# Altium PCB ExpandBoardZero.PcbDoc
Units mil, origin at the board's own origin, x right, y up, seen from the top; angles counter-clockwise.
Board outline 2559.06 x 1181.1 mil, 2 copper layers (Top Layer, Bottom Layer); 12 components, 11 nets, 78 pads, 4 vias.
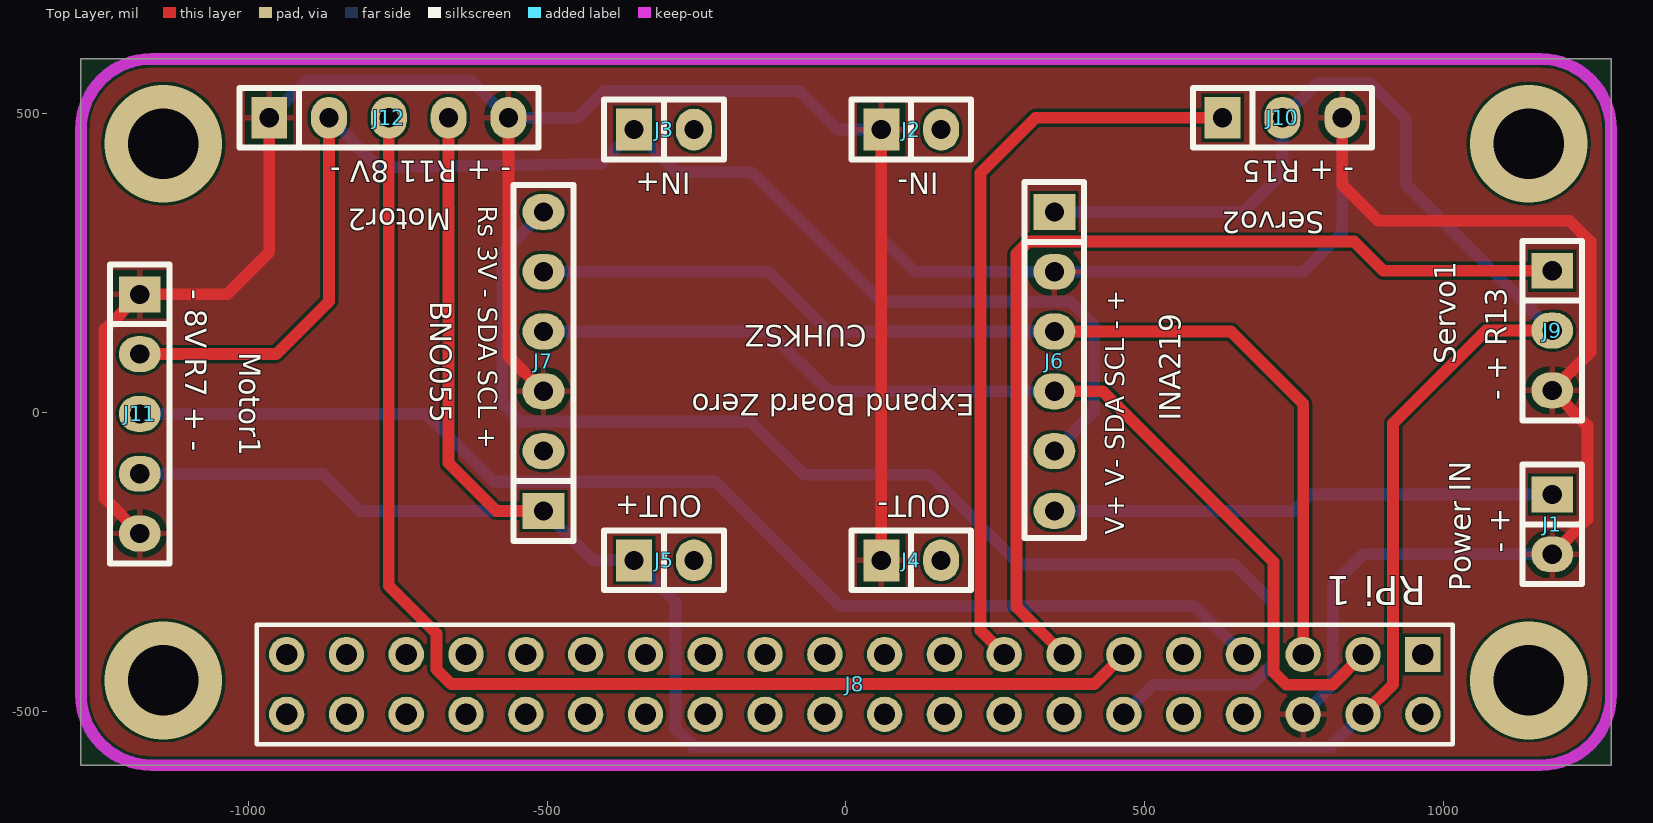
[diagram p0: Top Layer view]
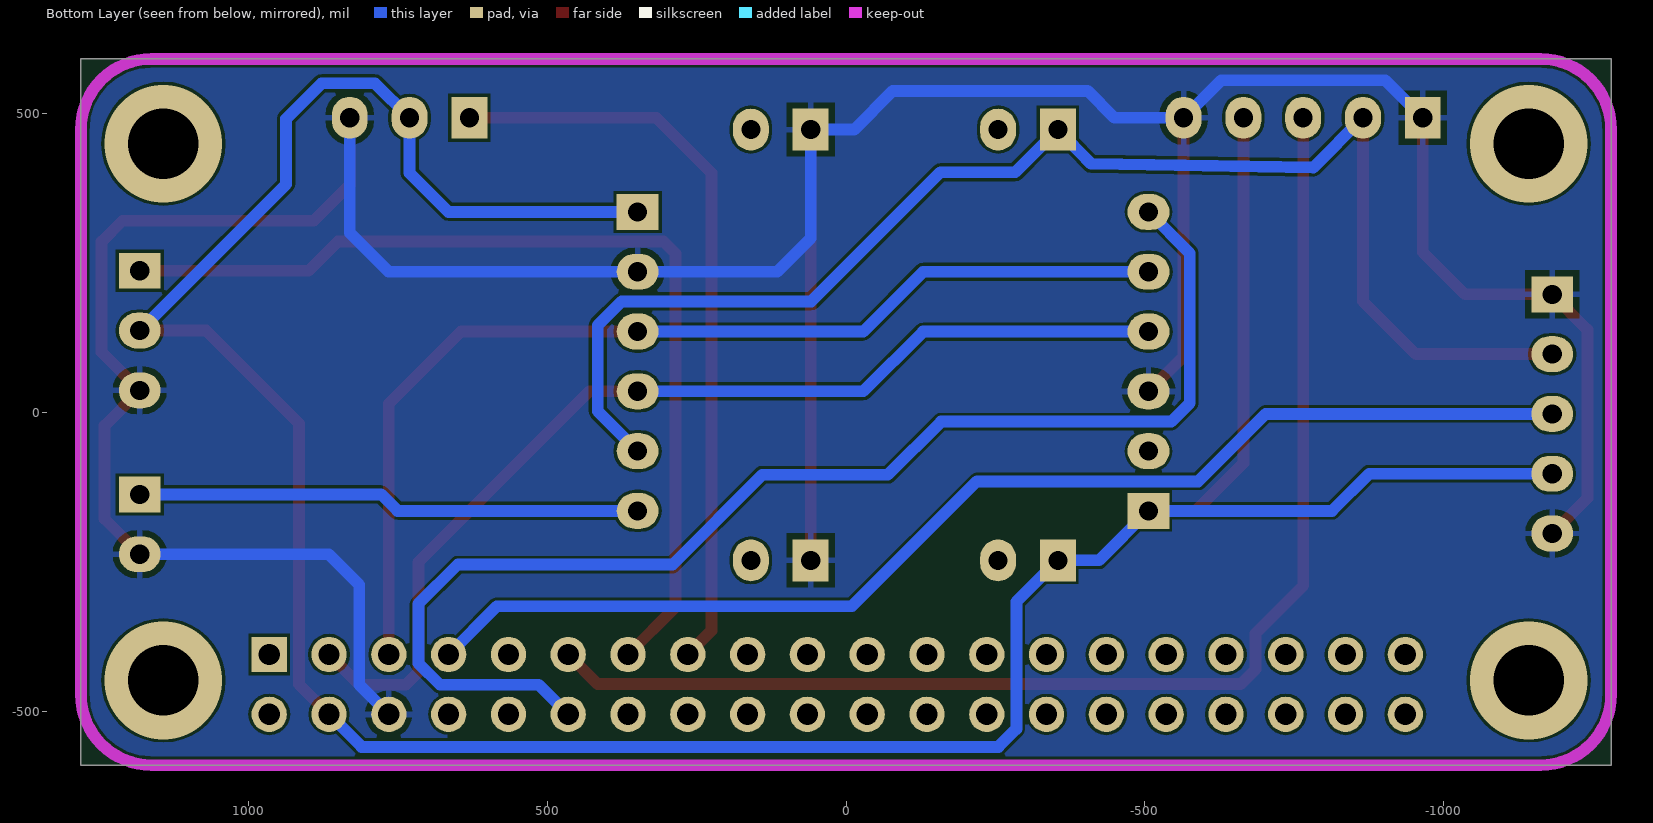
[diagram p1: Bottom Layer view, seen from below]

## Layer stack, top to bottom
Top Solder: solder mask 0.4, Solder Resist, Dk 3.5
Top Layer: signal copper 1.4
Dielectric 1: dielectric 12.6, FR-4, Dk 4.8
Bottom Layer: signal copper 1.4
Bottom Solder: solder mask 0.4, Solder Resist, Dk 3.5

## Board outline
-1279.53,-590.55 1279.53,-590.55 1279.53,590.55 -1279.53,590.55

## Design rules (kind name [scope] priority, off if disabled: settings)
Clearance [All] p1: gap=4.92
PolygonConnect [All] p1: connectstyle=Relief reliefconductorwidth=10 reliefentries=4 polygonreliefangle="90 Angle" airgapwidth=10
RoomDefinition relay [InComponentClass('relay')] p1: confinementstyle=ConfineIn formatcopy=TRUE lockcomponents=FALSE outline -1279.53,-590.55 1279.53,-590.55 1279.53,590.55 -1279.53,590.55
RoutingVias [All] p1: holewidth=28 width=50 viastyle="Through Hole" minholewidth=28 minwidth=50 maxholewidth=28 maxwidth=50
ShortCircuit [All] p1: allowed=TRUE
SolderMaskExpansion [All] p1: expansion=4
Width [All] p1: maxlimit=3937.01 minlimit=19.68 preferedwidth=19.68
29 further rules are at their usual default settings.

## Components (designator, comment, footprint, x,y, rotation, side; value= is the part's Value field where it differs from the comment)
J1 "Power" "Pin HDR1X2/2.54mm-S" 1181.1,-137.8 r0 top
J2 "IN-" "Pin HDR1X2/2.54mm-S" 59.06,472.44 r90 top
J3 "IN+" "Pin HDR1X2/2.54mm-S" -354.33,472.44 r90 top
J4 "OUT-" "Pin HDR1X2/2.54mm-S" 59.06,-248.03 r90 top
J5 "OUT+" "Pin HDR1X2/2.54mm-S" -354.33,-248.03 r90 top
J6 "INA219" "Pin HDR1X6/2.54mm-S" 348.43,334.65 r0 top
J7 "BNO055" "Pin HDR1X6/2.54mm-S" -505.91,-165.35 r180 top
J8 "Raspberry Pi" "Pin HDR2X20/2.54mm-S" 964.57,-405.51 r180 top
J9 "Servo1" "Pin HDR1X3/2.54mm-S" 1181.1,236.22 r0 top
J10 "Servo2" "Pin HDR1X3/2.54mm-S" 629.92,492.13 r90 top
J11 "Motor1" "Pin HDR1X5/2.54mm-S" -1181.1,196.85 r0 top
J12 "Motor2" "Pin HDR1X5/2.54mm-S" -964.57,492.13 r90 top

## Footprints (in the part's own frame and the unit in brackets; to place one, negate y for a bottom-side part, rotate by r counter-clockwise, add the part's x,y. Pads: shape width x height; smd on the part's side, far side on the other; paste and mask are expansions set on the pad)
"Pin HDR1X2/2.54mm-S" [mil]
  rect 70x60 hole 32: 1(0,0)
  oval 70x60 hole 32: 2(0,-100)
  silkscreen extent -50,-150 50,50, body extent -50,-150 50,50, height 336
"Pin HDR1X3/2.54mm-S" [mil]
  rect 70x60 hole 32: 1(0,0)
  oval 70x60 hole 32: 2(0,-100) 3(0,-200)
  silkscreen extent -50,-250 50,50, body extent -50,-250 50,50, height 336
"Pin HDR1X5/2.54mm-S" [mil]
  rect 70x60 hole 32: 1(0,0)
  oval 70x60 hole 32: 2(0,-100) 3(0,-200) 4(0,-300) 5(0,-400)
  silkscreen extent -50,-450 50,50, body extent -50,-450 50,50, height 336
"Pin HDR1X6/2.54mm-S" [mil]
  rect 70x60 hole 32: 1(0,0)
  oval 70x60 hole 32: 2(0,-100) 3(0,-200) 4(0,-300) 5(0,-400) 6(0,-500)
  silkscreen extent -50,-545 50,50, body extent -50,-545 50,55, height 336
"Pin HDR2X20/2.54mm-S" [mm] "Connector; Header; 20x2 Position"
  rect 1.5x1.5 hole 0.9: 1(0,0)
  round 1.5 hole 0.9: 2(0,2.54) 3(2.54,0) 4(2.54,2.54) 5(5.08,0) 6(5.08,2.54) 7(7.62,0) 8(7.62,2.54) 9(10.16,0) 10(10.16,2.54) 11(12.7,0) 12(12.7,2.54) 13(15.24,0) 14(15.24,2.54) 15(17.78,0) 16(17.78,2.54) 17(20.32,0) 18(20.32,2.54) 19(22.86,0) 20(22.86,2.54) 21(25.4,0) 22(25.4,2.54) 23(27.94,0) 24(27.94,2.54) 25(30.48,0) 26(30.48,2.54) 27(33.02,0) 28(33.02,2.54) 29(35.56,0) 30(35.56,2.54) 31(38.1,0) 32(38.1,2.54) 33(40.64,0) 34(40.64,2.54) 35(43.18,0) 36(43.18,2.54) 37(45.72,0) 38(45.72,2.54) 39(48.26,0) 40(48.26,2.54)
  silkscreen extent -1.27,-1.27 49.53,3.81, body extent -1.27,-1.27 49.53,3.81, height 7.58

## Part data
J1 J2 J3 J4 J5: library part "Pin HDR1X2"
J6 J7: library part "Pin HDR1X6"
J8: library part "Pin HDR2X20"
J9 J10: library part "Pin HDR1X3"
J11 J12: library part "Pin HDR1X5"

## Via types
v1: diameter 196.85, hole 118.11, Top Layer to Bottom Layer, 4 vias

## Nets (pads, with @x,y where several pads share a name; then routed paths per layer and width w, separated by ;. In a path a pad name is that pad's centre, name@x,y a point inside that pad or via, vN(x,y) a via of type N, cw(c..) or ccw(c..) an arc to the next point about the centre after c; other vN are vias at no path point)
CS_SCL: J6.3 J7.5 J8.5 | length 1781.4
  Top Layer w19.68: J6.3 644,134.65 764.57,14.08 J8.5
  Bottom Layer w19.68: J7.5 -129,234.65 -29,134.65 J6.3
CS_SDA: J6.4 J7.4 J8.3 | length 1743.8
  Top Layer w19.68: J6.4 429.35,34.65 715,-251 715,-435 736,-456 814.08,-456 J8.3
  Bottom Layer w19.68: J7.4 -129,134.65 -29,34.65 J6.4
CS_VCC: J3.1 J6.5 J11.2 J12.2 | length 2371.9
  Top Layer w19.68: J11.2 -953.15,96.85 -864.57,185.43 J12.2
  Bottom Layer w19.68: J12.2 -781.33,408.9 -409.81,415.08 J3.1 -282.89,401 -158,401 58,185 375,185 415,145 415,1.22 J6.5
GND: J1.2 J2.1 J4.1 J6.2 J7.3 J8.6 J9.3 J10.3 J11.1 J11.5 J12.1 J12.5 | length 6228
  Top Layer w19.68: J11.5 -1240,-144.25 -1240,137.95 J11.1 -1035,196.85 -964.57,267.28 J12.1 ; J12.5 -564.57,93.31 J7.3 ; J4.1 J2.1 ; J10.3 829.92,380 889.92,320 1210,320 1245,285 1245,100.12 J9.3 1240,-22.68 1240,-178.9 J1.2
  Bottom Layer w19.68: J12.1 -901.69,555 -627.44,555 J12.5 -448.87,492.13 -404,537 -78,537 -13.44,472.44 J2.1 59.06,290.59 115,234.65 J6.2 765,234.65 829.92,299.57 J10.3 ; J8.6 814.08,-456 814.08,-288.72 865,-237.8 J1.2
IMU_RST: J7.6 J8.12 | length 2162.3
  Bottom Layer w19.68: J7.6 -575,265.55 -575,15 -544,-16 -159,-16 -70,-105 140,-105 290,-255 649,-255 715,-321 715,-420 679,-456 514.08,-456 J8.12
POW_VCC: J1.1 J6.6 | length 844.1
  Bottom Layer w19.68: J6.6 750,-165.35 777.56,-137.8 J1.1
PWM_M1: J8.7 J11.3 | length 2012.3
  Bottom Layer w19.68: J11.3 -701.85,-3.15 -589,-116 -219,-116 -10,-325 584.05,-325 J8.7
PWM_M2: J8.11 J12.3 | length 2135.5
  Top Layer w19.68: J12.3 -764.57,-290.43 -685,-370 -685,-430 -660,-455 415.08,-455 J8.11
PWM_S1: J8.13 J9.1 | length 1628.1
  Top Layer w19.68: J8.13 285,-325.95 285,265 305,285 850,285 898.78,236.22 J9.1
PWM_S2: J8.15 J10.1 | length 1265
  Top Layer w19.68: J8.15 225,-365.95 225,400 317.13,492.13 J10.1
VCC: J5.1 J6.1 J7.1 J8.4 J9.2 J10.2 J11.4 J12.4 | length 5201.2
  Top Layer w19.68: J12.4 -664.57,-85.79 -585,-165.35 J7.1 ; J8.4 915,-455.08 915,-18.78 1070,136.22 J9.2
  Bottom Layer w19.68: J11.4 -875,-103.15 -812.8,-165.35 J7.1 -423.23,-248.03 J5.1 -285,-317.36 -285,-530 -255,-560 810.08,-560 J8.4 ; J6.1 665,334.65 729.92,399.57 J10.2 787.79,550 877,550 936.5,490.5 936.5,380.82 J9.2
pads on no net: J2.2 J3.2 J4.2 J5.2 J7.2 J8.1 J8.2 J8.8 J8.9 J8.10 J8.14 J8.16 J8.17 J8.18 J8.19 J8.20 J8.21 J8.22 J8.23 J8.24 J8.25 J8.26 J8.27 J8.28 J8.29 J8.30 J8.31 J8.32 J8.33 J8.34 J8.35 J8.36 J8.37 J8.38 J8.39 J8.40
copper on no net:
  other v1: -1141.73,-448.82 1141.73,-448.82 -1141.73,448.82 1141.73,448.82

## Polygon pours and split planes (outlines as drawn)
GND on Bottom Layer "Top Layer-No Net" (solid, remove dead copper, pour order 14): -1305,615 -1300,610 1290,610 1290,-615 1285,-610 -1310,-610
GND on Top Layer "Top Layer-No Net" (solid, pour order 16): -1279.53,590.55 1279.53,590.55 1279.53,-590.55 -1279.53,-590.55 -1279.53,590.55

## Keep-outs
Keep-Out Layer:
  lines w19.68: -1279.53,-472.44 ccw(c-1161.42,-472.44) -1161.42,-590.55 1161.42,-590.55 ccw(c1161.42,-472.44) 1279.53,-472.44 1279.53,472.44 ccw(c1161.42,472.44) 1161.42,590.55 -1161.42,590.55 ccw(c-1161.42,472.44) -1279.53,472.44 -1279.53,-472.44

## Silkscreen, mask and mechanical layers (free items; w line width, h text height)
Top Overlay:
  text "- + R11 8V -" at -560,420 h36 r180
  text "- + R15" at 850,420 h36 r180
  text "IN+" at -260,400 h36 r180
  text "IN-" at 155,400 h36 r180
  text "Rs 3V - SDA SCL +" at -615,345 h32 r270
  text "Motor2" at -660,340 h36 r180
  text "Servo2" at 800,335 h36 r180
  text "- 8V R7 + -" at -1105,205 h36 r270
  text "BNO055" at -695,185 h36 r270
  text "CUHKSZ" at 35,145 h36 r180
  text "Motor1" at -1015,100 h36 r270
  text "Servo1" at 1020,80 h36 r90
  text "Expand Board Zero" at 215,30 h36 r180
  text "- + R13" at 1105,20 h36 r90
  text "INA219" at 560,-15 h36 r90
  text "OUT+" at -240,-140 h36 r180
  text "OUT-" at 175,-140 h36 r180
  text "V+ V- SDA SCL - +" at 465,-205 h32 r90
  text "- +" at 1110,-235 h36 r90
  text "RPi 1" at 970,-275 h48 r180
  text "Power IN" at 1045,-300 h36 r90